# Altium PCB PCB2.PcbDoc
Units mm, origin at the board's own origin, x right, y up, seen from the top; angles counter-clockwise.
Board outline 80 x 70 mm, 4 copper layers (Top Layer, Internal Plane 1, Internal Plane 2, Bottom Layer), stack 0.462 mm thick; 51 components, 38 nets, 151 pads, 32 vias.
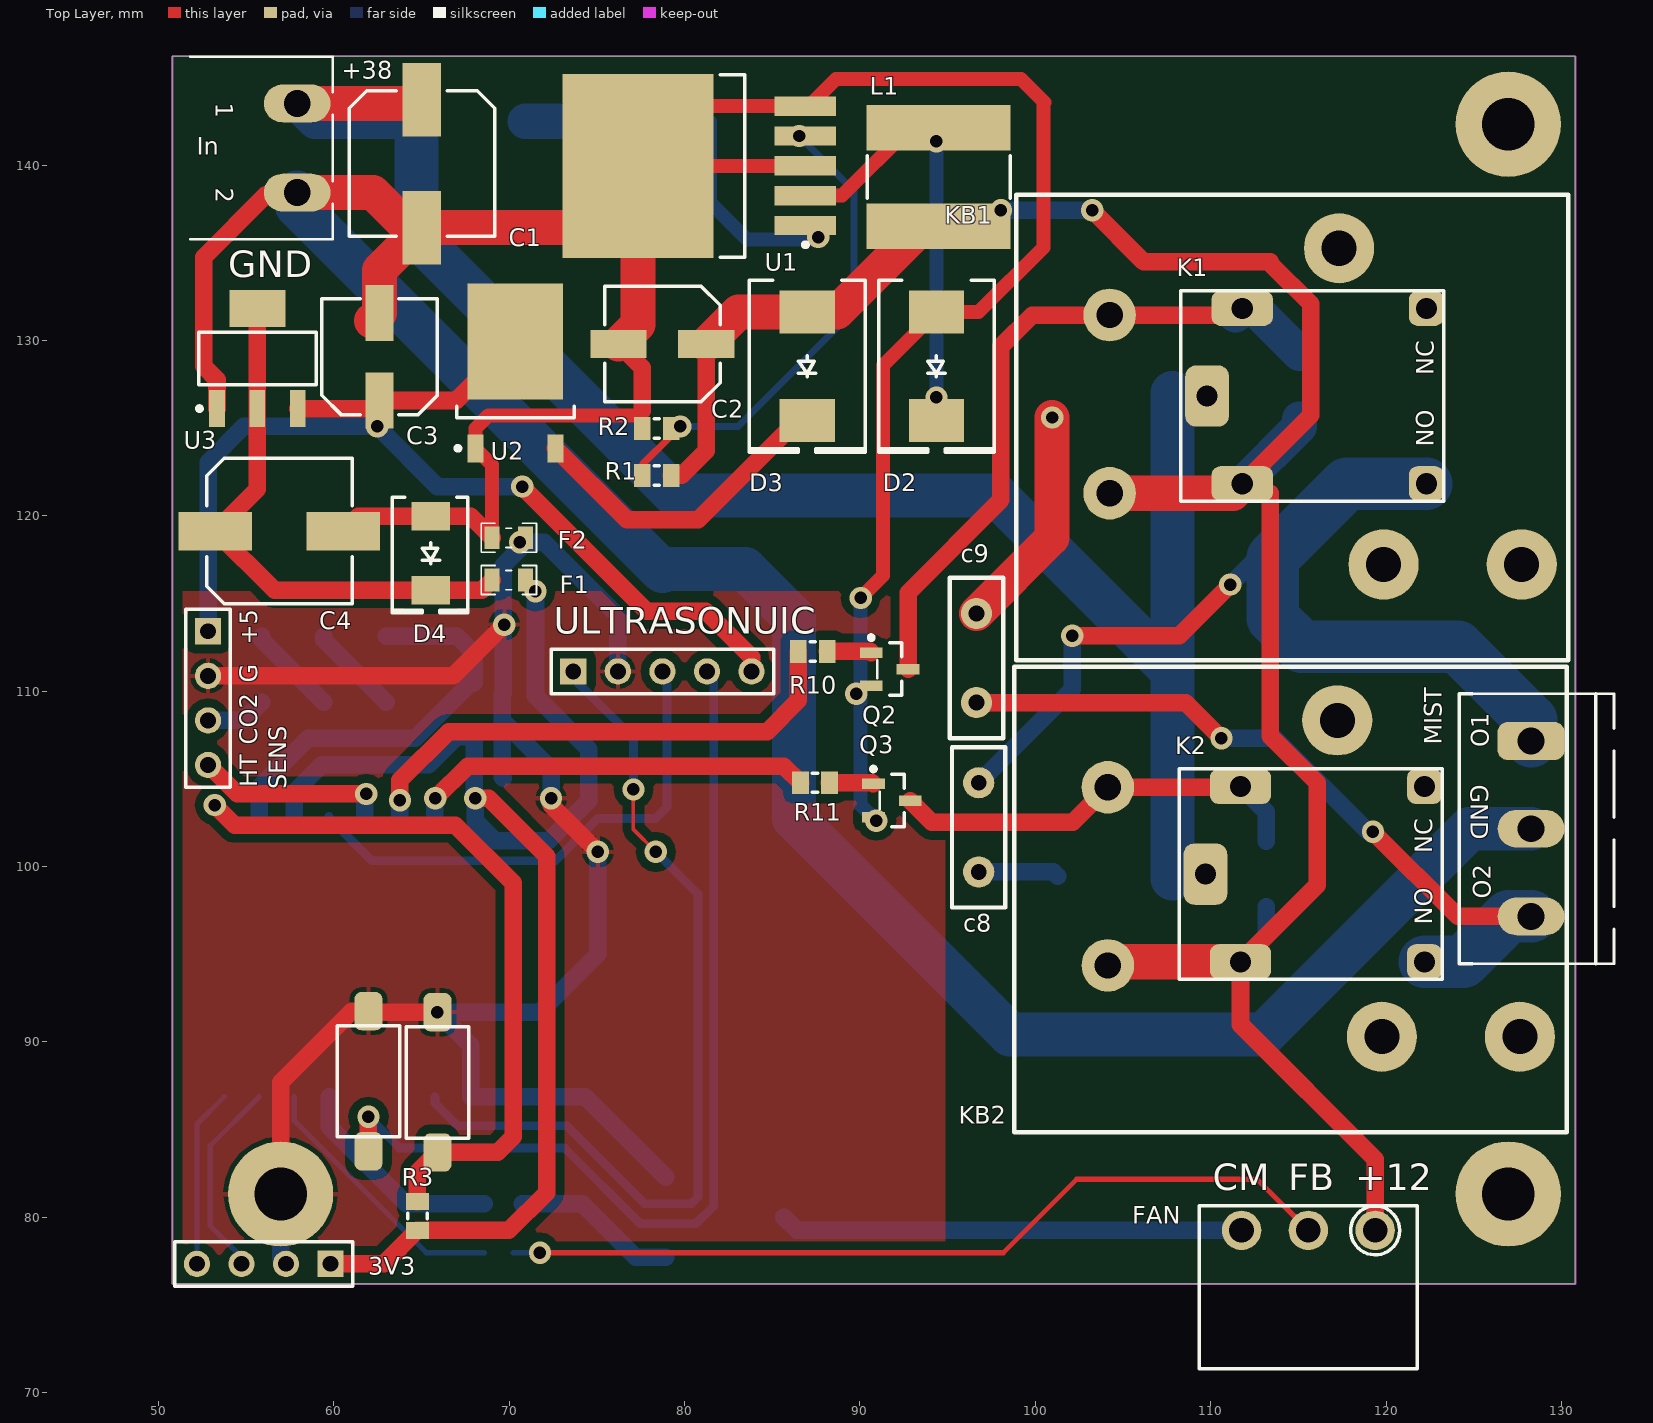
[diagram p0: Top Layer view]
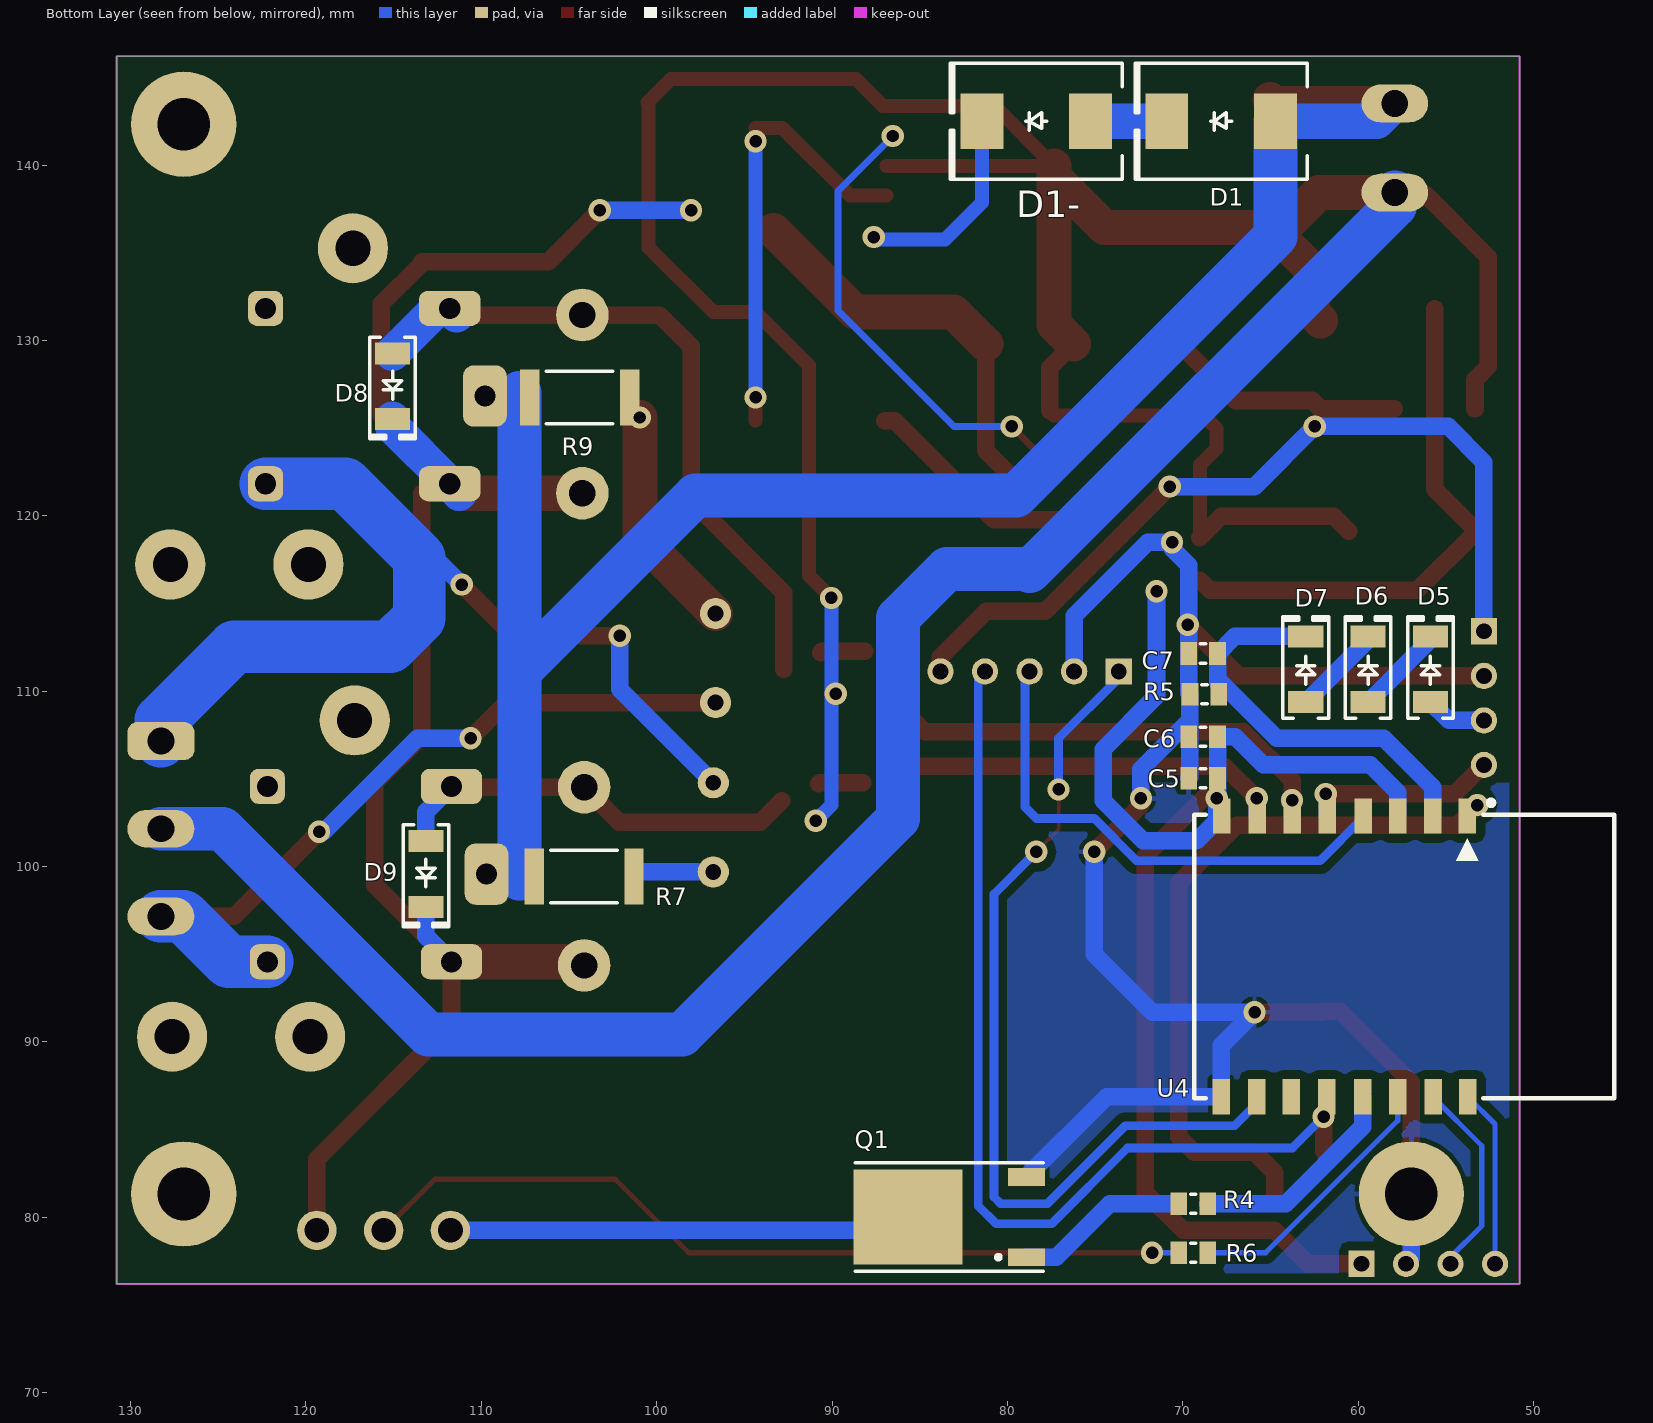
[diagram p1: Bottom Layer view, seen from below]
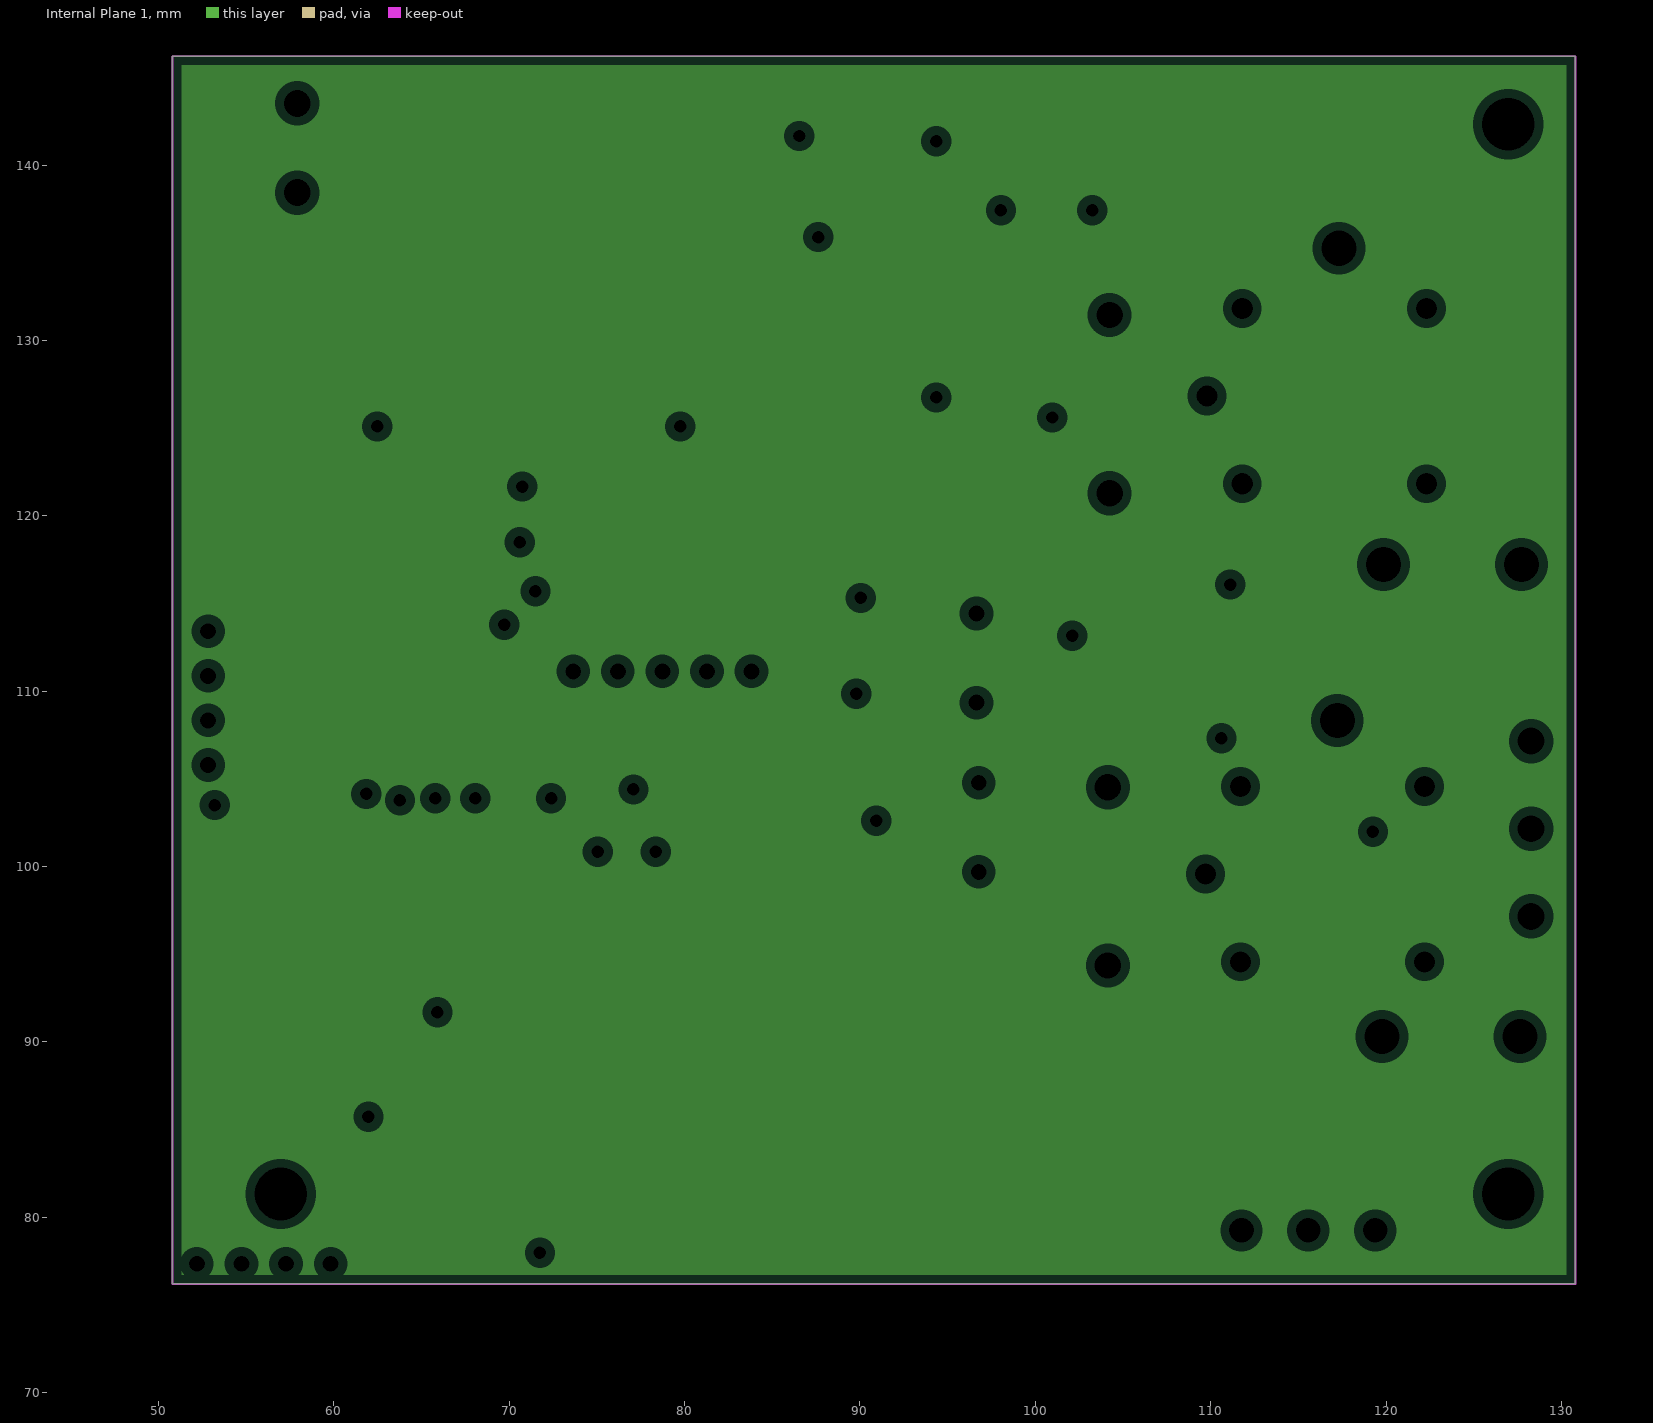
[diagram p2: Internal Plane 1, clearances drawn from the general rule]
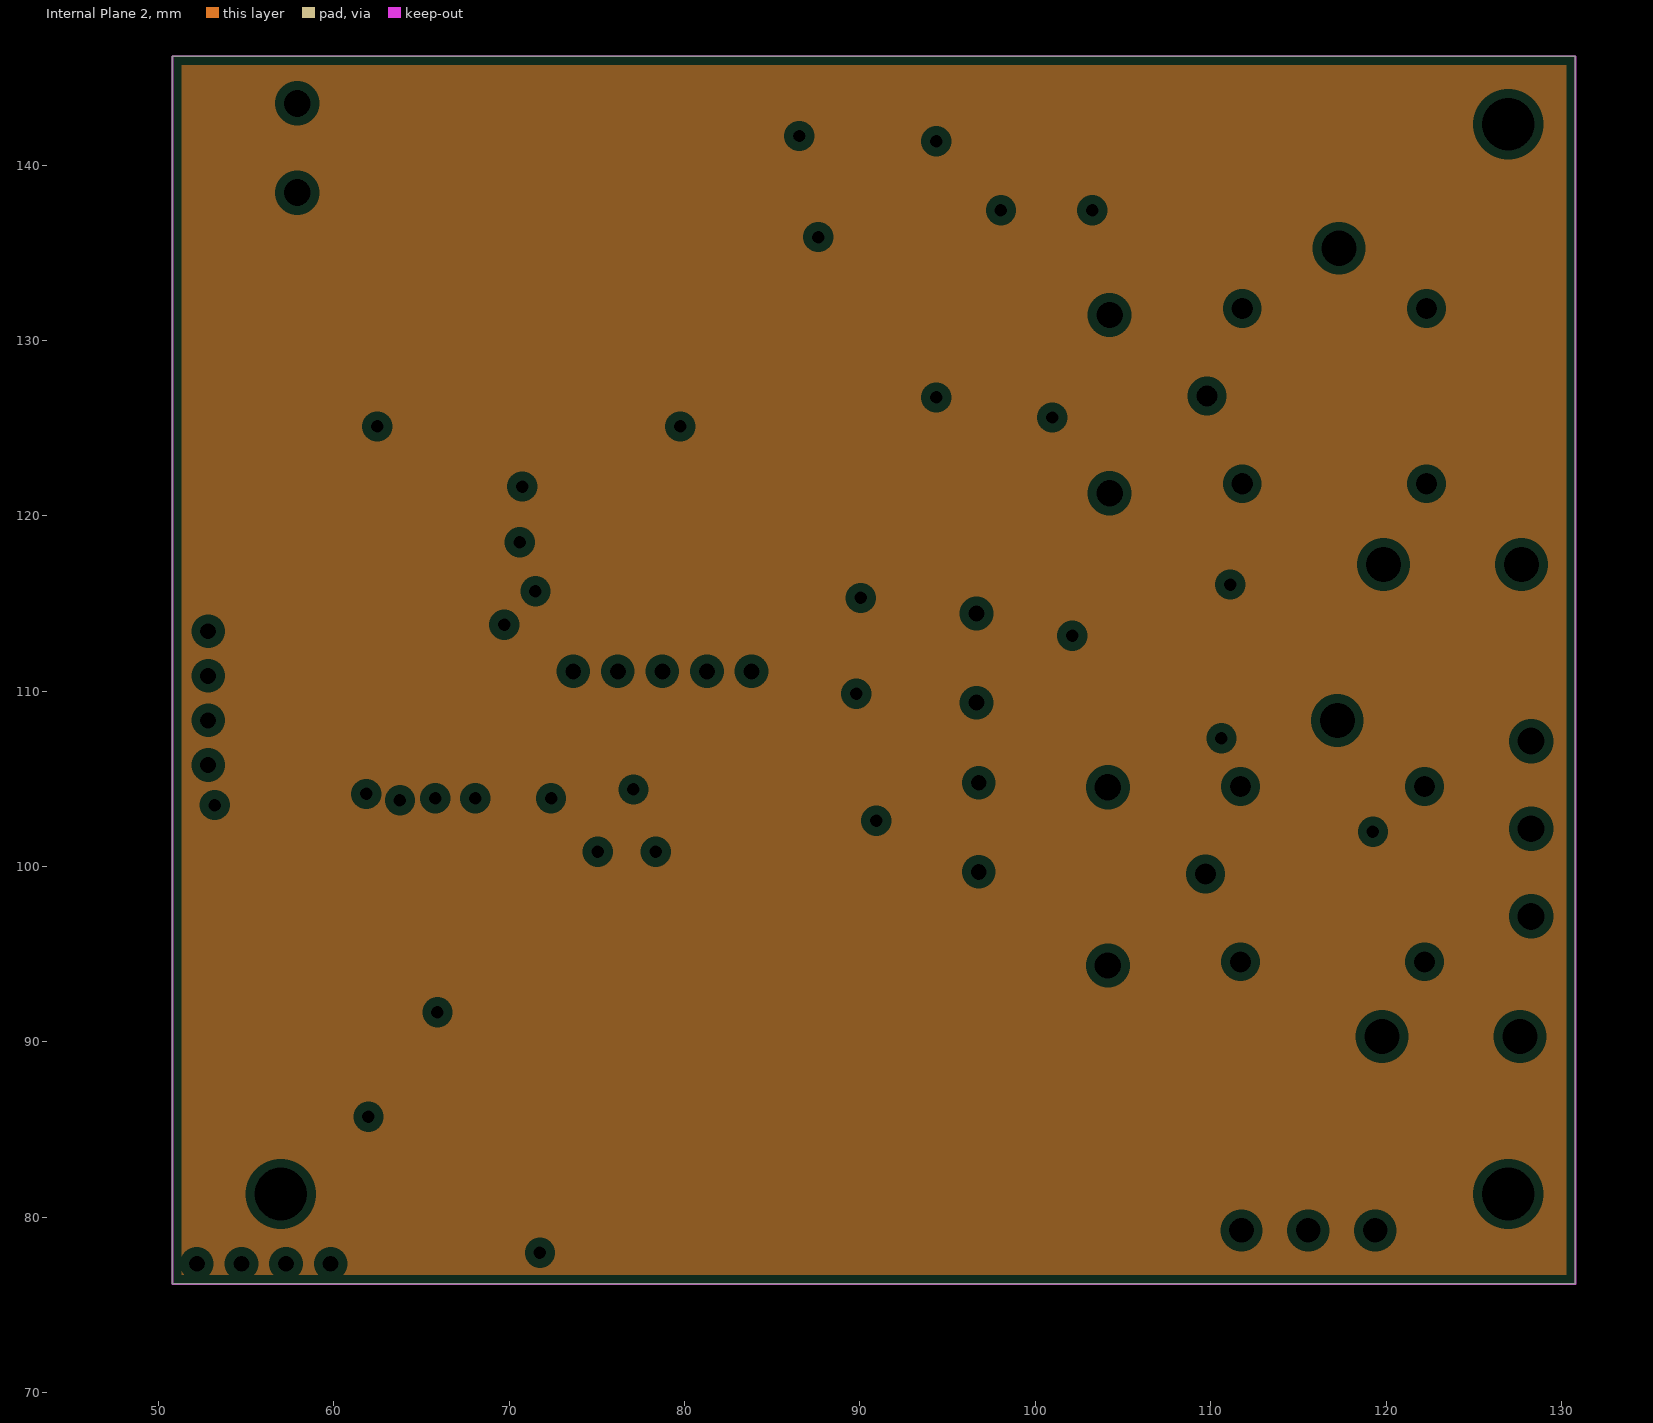
[diagram p3: Internal Plane 2, clearances drawn from the general rule]
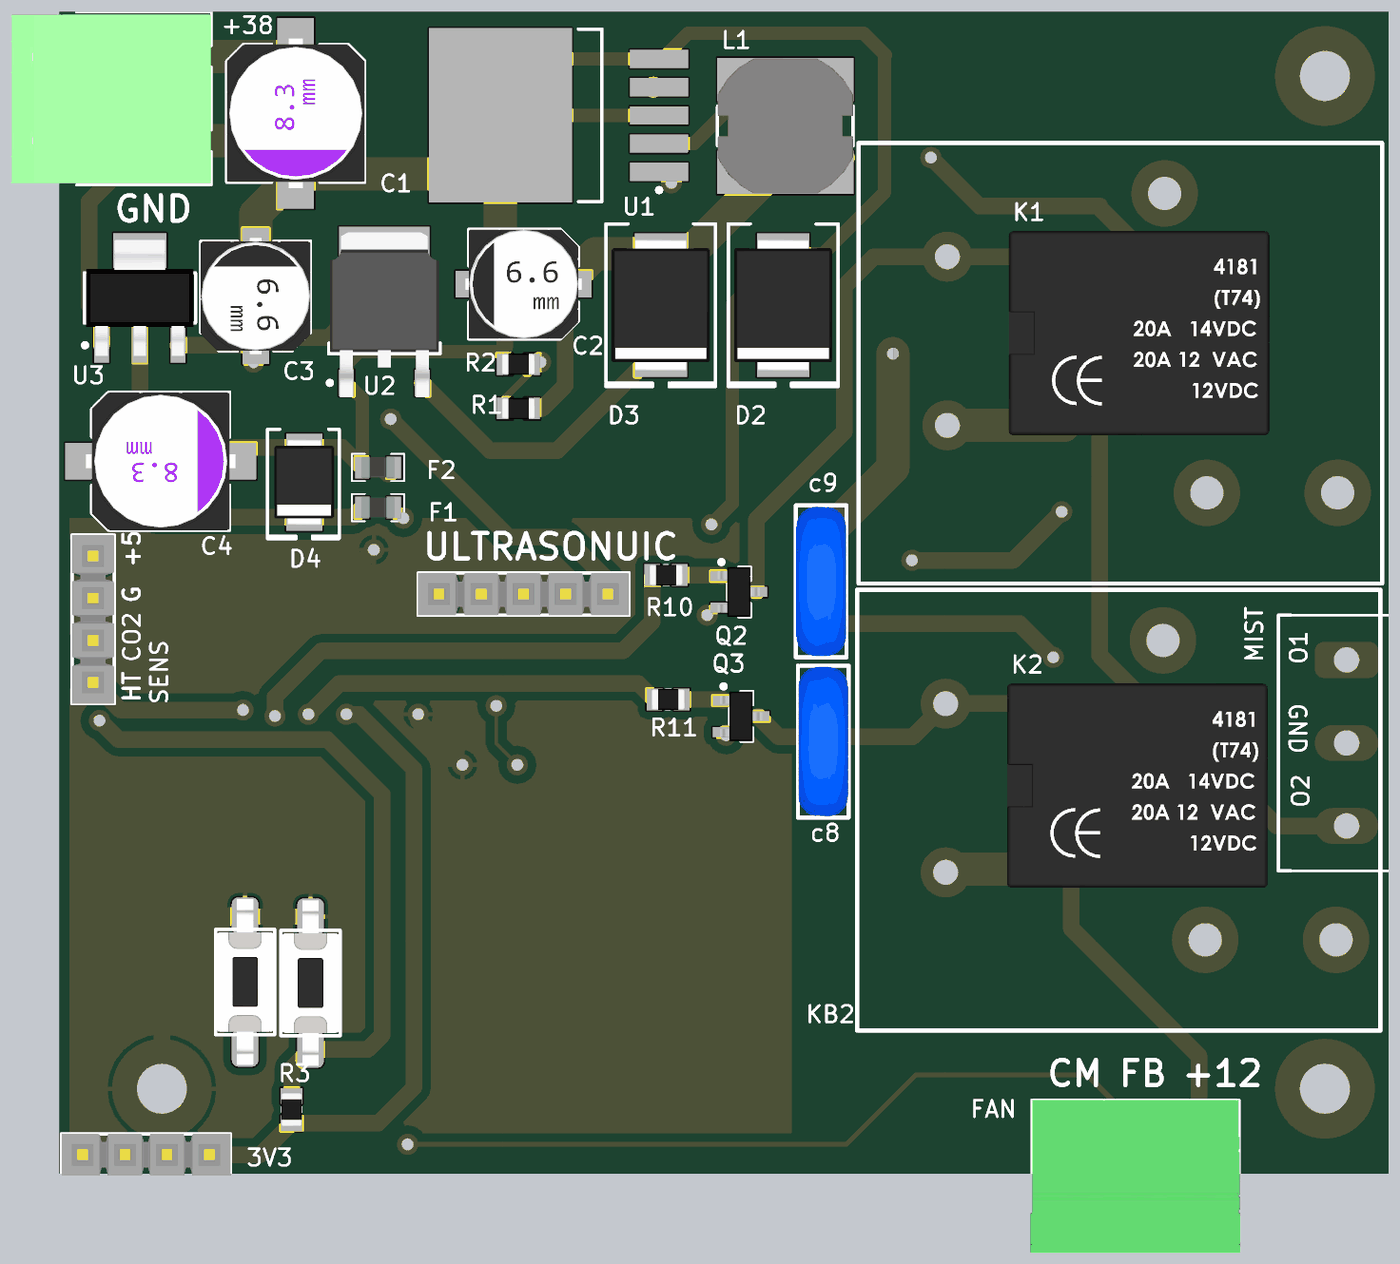
[diagram p4: 3D render of the assembled board from above, using the file's embedded part models]
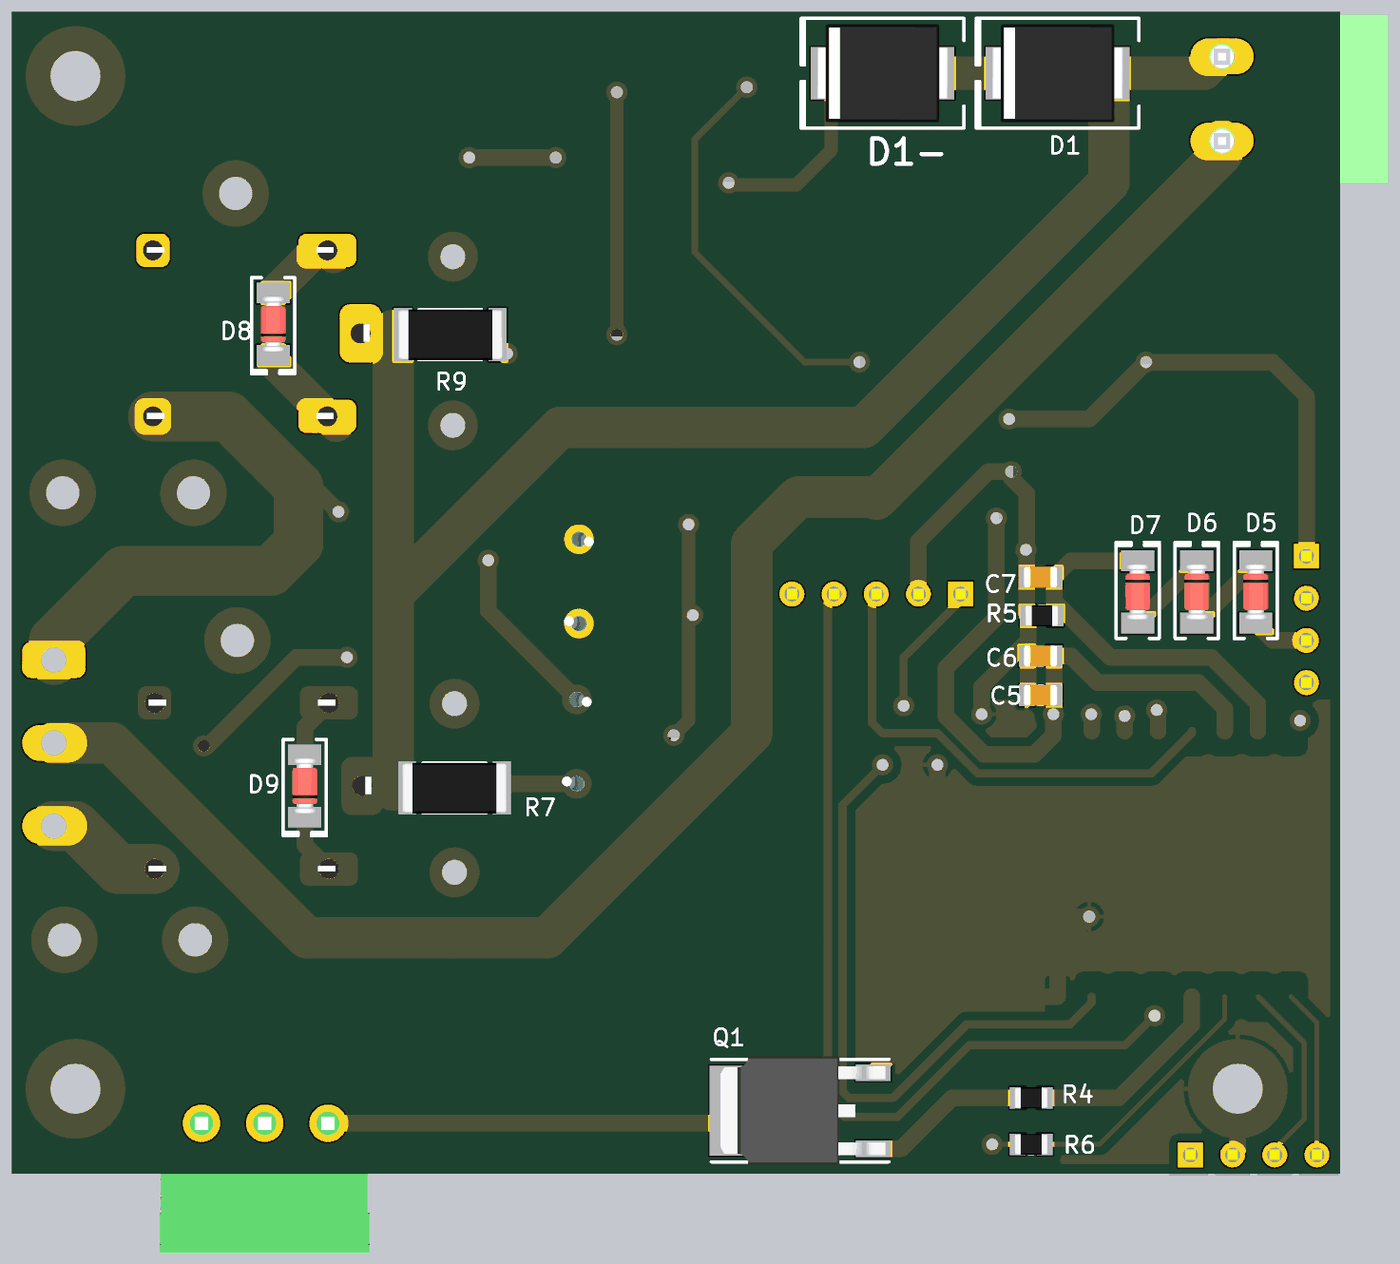
[diagram p5: 3D render of the assembled board from below, using the file's embedded part models]

## Layer stack, top to bottom
Top Solder: solder mask 0.0102, Solder Resist, Dk 3.5
Top Layer: signal copper 0.0356
Internal Plane 1: plane copper 0.0356
Internal Plane 2: plane copper 0.0356
Dielectric 1: dielectric 0.32, FR-4, Dk 4.8
Bottom Layer: signal copper 0.0356
Bottom Solder: solder mask 0.0102, Solder Resist, Dk 3.5

## Board outline
50.8,76.2 130.8,76.2 130.8,146.2 50.8,146.2

## Design rules (kind name [scope] priority, off if disabled: settings)
Clearance [All] p1: gap=0.2 ignorepadtopadclearanceinfootprint=FALSE except(0.5: Arc-Poly Track-Poly SMDPad-Poly THPad-Poly Via-Poly Fill-Poly Poly-Poly)
PlaneClearance [All] p1: clearance=0.508
PlaneConnect [All] p1: planeconnectstyle=Relief reliefexpansion=0.508 reliefentries=4 reliefconductorwidth=0.254 reliefairgap=0.254
PolygonConnect [All] p1: connectstyle=Relief reliefconductorwidth=0.254 reliefentries=4 polygonreliefangle="90 Angle" airgapwidth=0.254
RoutingVias [All] p1: holewidth=0.6 width=1 viastyle="Through Hole" minholewidth=0.6 minwidth=0.8 maxholewidth=0.711 maxwidth=1.27
SolderMaskExpansion [All] p1: expansion=0.102
Width [All] p1: maxlimit=3 minlimit=0.2 preferedwidth=2 minimp=50.000000 maximp=50.000000 favimp=50.000000
28 further rules are at their usual default settings.

## Classes and differential pairs
component class timer: C1 C2 C3 C4 C5 C6 C7 c8 c9 D1 D1- D2 D3 D4 D5 D6 D7 D8 D9 F1 F2 FAN In K1 K2 KB1 KB2 L1 MIST Q1 Q2 Q3 R1 R2 R3 R4 R5 R6 R7 R9 R10 R11 SENS U1 U2 U3 U4 ULTRASONUIC

## Components (designator, comment, footprint, x,y, rotation, side; value= is the part's Value field where it differs from the comment)
3V3 "Header 4" HDR1X4 59.817,77.343 r180 top (schematic designator PR)
C1 "Cap Polar" "CAP ALSMD POLY 8.3MM H10.5MM" 65.024,140.081 r270 top
C2 "220uF" "CAP ALSMD 6.6MM H8.0MM" 78.74,129.794 r180 top
C3 "220uF" "CAP ALSMD 6.6MM H8.0MM" 62.611,129.072 r90 top
C4 "1000uF" "CAP ALSMD POLY 8.3MM H10.5MM" 56.896,119.126 r0 top
C5 "100nF" SMD_CAP_0805 69.669,105.029 r180 bottom
C6 "10uF" SMD_CAP_0805 69.669,107.4 r180 bottom
C7 "10uF" SMD_CAP_0805 69.669,112.141 r180 bottom
c8 "100nF" CAP-20 96.774,102.235 r90 top
c9 "100nF" CAP-20 96.647,111.887 r270 top
D1 "M7" "DO214AB SMC" 67.818,142.494 r0 bottom
D1- "M7" "DO214AB SMC" 78.359,142.494 r0 bottom
D2 "SS34" "DO214AB SMC" 94.361,128.524 r270 top
D3 "M7" "DO214AB SMC" 86.995,128.524 r270 top
D4 "TVS3.3" "ST DO214AA SMB" 65.532,117.856 r270 top
D5 "1n4148" "SOD-80 MiniMELF" 55.88,111.252 r90 bottom
D6 "1n4148" "SOD-80 MiniMELF" 59.436,111.252 r90 bottom
D7 "1n4148" "SOD-80 MiniMELF" 62.992,111.252 r90 bottom
D8 "1n4148" "SOD-80 MiniMELF" 115.062,127.381 r270 bottom
D9 "1n4148" "SOD-80 MiniMELF" 113.157,99.568 r270 bottom
F1 "Ferrite Bead SMD" FB0805 69.977,116.332 r180 top
F2 "Ferrite Bead SMD" FB0805 69.977,118.745 r180 top
FAN "FCI-381-3P" "FCI 06-381-3PIN" 115.57,75.946 r180 top
FLASH "Switch PB" "TE FSMSMTR" 61.976,87.757 r180 top
In "" "MSTB 2,5/2-G-5,08" 57.912,140.97 r270 top
K1 "Relay" "Relay mini milon" 116.051,126.826 r90 top
K2 "Relay" "Relay mini milon" 115.951,99.568 r90 top
KB1 "Relay" Relay-NT90 117.321,135.255 r270 top
KB2 "Relay" Relay-NT90 117.221,108.331 r270 top
L1 "33uH" "BOURNS SRN8040" 94.488,139.319 r270 top
MIST "FCI-381-3P" "MSTBV 2,5/3-G-5" 128.27,102.155 r90 top
Q1 "MJE13003" TO-252 82.296,80.01 r270 bottom
Q2 "BC817" SOT23_N 91.694,111.252 r0 top
Q3 "BC817" SOT23_N 91.821,103.759 r0 top
R1 "?" "RES 0805 (2012X06L)" 77.597,122.301 r0 top
R2 "1.21K" "RES 0805 (2012X06L)" 77.597,124.968 r0 top value=1.21k
R3 "1.21K" "RES 0805 (2012X06L)" 64.77,80.899 r270 top value=1.21k
R4 "1k" "RES 0805 (2012X06L)" 68.58,80.772 r0 bottom
R5 "1k" "RES 0805 (2012X06L)" 67.946,109.819 r0 bottom
R6 "1k" "RES 0805 (2012X06L)" 70.23,77.978 r180 bottom
R7 "22" "RES 2512 (6331X07L)" 104.14,99.441 r180 bottom
R9 "22" "RES 2512 (6331X07L)" 104.394,126.746 r180 bottom
R10 "1K" "RES 0805 (2012X06L)" 88.138,112.268 r180 top
R11 "1K" "RES 0805 (2012X06L)" 88.264,104.775 r180 top
RST "Switch PB" "TE FSMSMTR" 65.913,87.694 r0 top
SENS "Header 4" HDR1X4 52.832,113.411 r270 top
U1 "LM2596S-ADJ" TS5B_M 80.843,139.954 r180 top
U2 "AMS1117IMP-x.x_1" TO-252-AMS1117 70.358,128.143 r90 top
U3 "AMS1117IMP-x.x_1" SOT223-AMS1117 55.64,128.961 r90 top
U4 "ESP-8266" ESP_12E 45.452,102.921 r270 bottom
ULTRASONUIC "Header 5" HDR1X5 73.66,111.125 r0 top

## Footprints (in the part's own frame and the unit in brackets; to place one, negate y for a bottom-side part, rotate by r counter-clockwise, add the part's x,y. Pads: shape width x height; smd on the part's side, far side on the other; paste and mask are expansions set on the pad)
"BOURNS SRN8040" [mm] "Power Inductor, 2-Leads, Bourns, SRN8040-220M"
  rect 2.6x8.2 smd: 1(-2.8,0) 2(2.8,0)
  silkscreen extent -1.2,-4.07 1.2,4.08, body extent -4.08,-4.07 4.07,4.08, height 4
"CAP ALSMD 6.6MM H8.0MM" [mm] "Aluminum Electrolytic Capacitor, Body 6.60x6.60x8.0mm, IPC Low Density"
  rect 3.2x1.6 smd: 1(-2.5,0) 2(2.5,0)
  silkscreen extent -3.3,-3.3 3.3,3.3, body extent -3.5,-3.3 3.5,3.3, height 8
"CAP ALSMD POLY 8.3MM H10.5MM" [mm] "Aluminum Electrolytic Capacitor, Body 8.30x8.30x10.5mm"
  rect 4.2x2.2 smd: 1(-3.65,0) 2(3.65,0)
  silkscreen extent -4.15,-4.15 4.15,4.15, body extent -4.5,-4.15 4.5,4.15, height 10.5
CAP-20 [mil]
  round 70 hole 35.43 mask+0: 1(-100,0) 2(100,0)
  silkscreen extent -180,-60 180,60, body extent -177,-59 177,59, height 491
"DO214AB SMC" [mm] "Molded Diode, 2-Leads, Body 6.85x5.90mm, IPC Medium Density"
  rect 2.45x3.15 smd: 1(-3.1,0) 2(3.1,0)
  silkscreen extent -4.9,-3.3 4.9,3.3, body extent -3.97,-2.95 3.97,2.95, height 2.6
ESP_12E [mm]
  rect 2x1 smd: 1(0.051,-8.331) 2(0.051,-10.301) 3(0.051,-12.301) 4(0.051,-14.271) 5(0.051,-16.311) 6(0.051,-18.321) 7(0.051,-20.311) 8(0.051,-22.321) 9(16.051,-22.361) 10(16.051,-20.321) 11(16.051,-18.361) 12(16.051,-16.341) 13(16.051,-14.281) 14(16.051,-12.301) 15(16.051,-10.281) 16(16.051,-8.301)
  silkscreen extent -0.86,-23.9 16.13,0.04, body extent 0.05,-23.88 16.05,0.5, height 2.6
FB0805 [mm] "Ferrite Chip Bead SMD 0805-Design:Ali Hafizi"
  rect 0.85x1.3 smd: 1(-0.95,0) 2(0.95,0)
  silkscreen extent -1.57,-0.82 1.58,0.83, body extent -1,-0.63 1,0.62, height 0.85
"FCI 06-381-3PIN" [mm] "FCI Pluggable Terminal Block"
  round 2.25 hole 1.4: 1(-3.81,-3.302) 2(0,-3.302) 3(3.81,-3.302)
  silkscreen extent -6.22,-4.7 6.22,4.57, body extent -6.31,-4.7 6.31,4.5, height 7.6
HDR1X4 [mm] "Connector; Header; 4 Position"
  rect 1.5x1.5 hole 0.9: 1(0,0)
  round 1.5 hole 0.9: 2(2.54,0) 3(5.08,0) 4(7.62,0)
  silkscreen extent -1.27,-1.27 8.89,1.27, body extent -1.27,-1.28 8.89,1.26, height 8.38
HDR1X5 [mm] "Connector; Header; 5 Position"
  rect 1.5x1.5 hole 0.9: 1(0,0)
  round 1.5 hole 0.9: 2(2.54,0) 3(5.08,0) 4(7.62,0) 5(10.16,0)
  silkscreen extent -1.27,-1.27 11.43,1.27, body extent -1.28,-1.27 11.42,1.27, height 8.38
"MSTB 2,5/2-G-5,08" [mil] "Header, Nominal current: 12 A Rated voltage (III/2): 320 V Number of positions: 2 Pitch: 5.08 mm Color: green Contact surface: Tin Assembly: Soldering DESIGNER:ABBAS BASEREH"
  oval 85x150 hole 60: 1(-100,0) 2(100,0)
  silkscreen extent -205,-240 205,80, body extent -199,-394 201,79, height 340
"MSTBV 2,5/3-G-5" [mil] "Header, Nominal current: 12 A Rated voltage (III/2): 320 V Number of positions: 3 Pitch: 5mm Color: green Contact surface: Tin Assembly: Soldering  DESIGNER:ABBAS BASEREH"
  rrect50% 85x150 hole 60: 1(196.85,0)
  oval 85x150 hole 60: 2(0,0) 3(-196.85,0)
  silkscreen extent -303,-186 303,161, body extent -295,-185 295,154, height 473
"Relay mini milon" [mm]
  rrect50% 3.5x2.5 hole 1.2: 1(0,6.25)
  rrect50% 2x2 hole 1.2: 2(5,-6.25) 3(-5,-6.25)
  rrect50% 2x3.5 hole 1.2: 4(5,4.25) 5(-5,4.25)
  silkscreen extent -6,-7.25 6,7.75, body extent -6.13,-7.58 6.17,8.12, height 13.71
Relay-NT90 [mm]
  round 4 hole 2: 1(0,0) 2(18.034,10.414) 3(18.034,2.54)
  round 3 hole 1.5: 4(3.81,-13.081) 5(13.97,-13.081)
  silkscreen extent -3.05,-18.41 23.5,13.08
"RES 0805 (2012X06L)" [mm] "Chip Resistor, 2-Leads, Body 2.0x1.3mm, IPC High Density _ (0.100 W)"
  rect 0.95x1.3 smd: 1(0,0) 2(1.65,0)
  silkscreen extent 0.67,-0.55 0.97,0.55, body extent -0.19,-0.63 1.84,0.64, height 0.6
"RES 2512 (6331X07L)" [mm] "Chip Resistor, 2-Leads, Body 6.3x3.1mm, IPC High Density _ (0.500 W)"
  rect 1.1x3.2 smd: 1(-2.85,0) 2(2.85,0)
  silkscreen extent -1.9,-1.5 1.9,1.5, body extent -3.18,-1.52 3.17,1.52, height 0.6
SMD_CAP_0805 [mm]
  rect 0.95x1.3 smd: 1(0,0) 2(1.65,0)
  silkscreen extent 0.67,-0.55 0.97,0.55, body extent -0.19,-0.64 1.84,0.63, height 0.65
"SOD-80 MiniMELF" [mm] "Molded Diode, 2-Leads, Body 3.40x1.50mm, IPC Medium Density"
  rect 1.25x2 smd: 1(-1.875,0) 2(1.875,0)
  silkscreen extent -2.8,-1.3 2.99,1.3, body extent -1.7,-0.75 1.7,0.75, height 1.5
SOT23_N [mm] "SOT23, 3-Leads, Body 2.9x1.3mm, Pitch 0.95mm, Lead Span 2.3mm, IPC Medium Density"
  rect 1.3x0.6 smd: 1(-1.05,0.95) 2(-1.05,-0.95) 3(1.05,0)
  silkscreen extent -1.17,-1.5 0.7,1.92, body extent -1.27,-1.5 1.27,1.5, height 1.1
SOT223-AMS1117 [mm] "SOT223, 4-Leads, Body 6.5x3.5mm, Pitch 2.3mm, Lead Span 7mm, IPC High Density"
  rect 2.1x0.9 smd: 1(-2.85,2.3) 2(-2.85,0) 3(-2.85,-2.3)
  rect 2.1x3.2 smd: 4(2.85,0)
  silkscreen extent -2.97,-3.35 1.5,3.42, body extent -3.49,-3.24 3.49,3.24, height 1.64
"ST DO214AA SMB" [mm] "Molded Diode, 2-Leads, Body 4.31x3.62mm, IPC Medium Density"
  rect 1.62x2.18 smd: 1(-2.11,0) 2(2.11,0)
  silkscreen extent -3.2,-2.2 3.4,2.1, body extent -2.6,-1.8 2.6,1.8, height 2.4
"TE FSMSMTR" [mm]
  rrect50% 1.6x2.19 smd: 1(0,4) 2(0,-4)
  silkscreen extent -1.78,-3.18 1.78,3.18, body extent -1.75,-4.98 1.75,4.98, height 4.42
TO-252 [mm] "D-PAK/TO-252-AA; 3 Leads (1 Cropped); Body 10.1 (inc. leads) x 6.6 mm (LxW max)"
  rect 1x2.1 smd: 1(2.285,3.375) 3(-2.285,3.375)
  rect 5.4x6.2 smd: 2(0,-3.375)
  silkscreen extent -3.09,-6.38 3.08,4.32, body extent -3.27,-5.83 3.27,4.11, height 2.39
TO-252-AMS1117 [mm] "D-PAK, 4-Leads, Body 6.1x6.6mm, Pitch 2.29mm, Lead Span 9.7mm, IPC High Density"
  rect 1.6x0.9 smd: 1(-4.3,2.28) 3(-4.3,-2.28)
  round 1.524 smd: 2(-0.127,-0.127)
  rect 6.6x5.45 smd: 4(1.8,0)
  silkscreen extent -4.42,-3.35 -1.9,3.4, body extent -5.18,-3.27 4.76,3.27, height 2.34
TS5B_M [mm] "D2-PAK, 6-Leads, Body 8.6x10.2mm, Pitch 1.7mm, Lead Span 14.1mm, IPC Low Density"
  rect 3.5x1.1 smd: 1(-6.05,3.4) 2(-6.05,1.7) 3(-6.05,0) 4(-6.05,-1.7) 5(-6.05,-3.4)
  rect 8.6x10.5 smd: 6(3.5,0)
  silkscreen extent -6.18,-5.2 -1.2,5.2, body extent -2.6,-5.2 6.29,5.2, height 4.65

## Part data
3V3 SENS: "Header, 4-Pin", LatestRevisionDate=17-Jul-2002, LatestRevisionNote="Re-released for DXP Platform.", Publisher="Altium Limited"
C2 C3 C4: library part "Cap Polar", "Cap Polar"
C5 C6 C7 c8 c9: library part Cap-Bipolar, "Bipolar Capacitor", Voltage=100V, Adding Date=1387/12/20, Designer="Saeid Jorablo", Organazation=ControTec
D1 D1- D2 D3 D5 D6 D7 D8 D9: library part Diode, "Rectifier Diode"
D4: library part "Diode TVS", "Zener Diode"
F1 F2: library part "Ferrite Bead SMD Package", Designer="Ali Hafizi"
FAN MIST: "6 Pitch: 5.08 mm Color: green Contact surface: Tin Assembly", Manufacturer="PHOENIX CONTACT", Max Current="12 A", Voltage="320 V", Category=Connector, ComponentLink1Description="Header, Nominal current: 12 A Rated voltage (III/2): 320 V Number of positions: 6 Pitch: 5.08 mm Color: green Contact surface: Tin Assembly: Soldering  DESIGNER:ABBAS BASEREH", ComponentLink2Description=Reference, Connector type="PCB Terminal Block", Designer="ABBAS BASEREH", Mounting Technology=Through-Hole, PART.NO=PHOENIX, Pin Count=6, Positions=6, Revision 1=2017-3-1, Status=Unreleased
FLASH RST: "Push Button Switch"
In: library part CON_Phoenix_MSTB_02, "2 Pitch: 5.08 mm Color: green Contact surface: Tin Assembly", Manufacturer="PHOENIX CONTACT", Max Current="12 A", Voltage="320 V", Category=Connector, ComponentLink1Description="Header, Nominal current: 12 A Rated voltage (III/2): 320 V Number of positions: 2 Pitch: 5.08 mm Color: green Contact surface: Tin Assembly: Soldering  DESIGNER:ABBAS BASEREH", ComponentLink2Description=Reference, Connector type="PCB Terminal Block", Designer="ABBAS BASEREH", Mounting Technology=Through-Hole, PART.NO=PHOENIX, Pin Count=2, Positions=2, Revision 1=2017-3-1, Status=Unreleased
K1 K2 KB1 KB2: "SPDT Relay", Company=E.P.I.L, Design_Date=2011/10/31, Designer="Eng. Saeid Jorablo"
L1: library part "Inductor smd", "SMD Power Inductor WE-LHMI, L=6.8 µH", Inductance="6.8 µH", PartNumber=74437324068, ComponentLink1Description="Manufacturer URL", ComponentLink1URL=http://www.we-online.com, ComponentLink2Description=Datasheet, ComponentLink2URL=http://katalog.we-online.de/kataloge/eisos/media/pdf/74437324068.pdf, PackageReference="WE-LHMI 4020"
Q1: library part NPN, "NPN Transistor", Company="IPA CO", Designer="Saeid Jorablo", Last Update Time=2008/08/04
Q2 Q3: "45 V, 500 mA NPN general-purpose transistors", ComponentLink1Description="Manufacturer Link", ComponentLink1URL=http://www.nxp.com/, ComponentLink2Description=Datasheet, ComponentLink2URL=http://www.nxp.com/, DatasheetVersion=2017, LatestRevisionDate=2017, LatestRevisionNote="IPC-7351 Footprint Added.", PackageDescription="3-Pin SOT-23 Package 0.95 mm Pitch, 2.3 mm Lead Span", PackageReference=SOT23, PackageVersion=2017-2-8, Published=2017-2-8, Publisher="Abbas Basereh"
R1 R2 R3 R4 R5 R6 R7 R9: library part Resistor, "Resistor"
R10 R11: library part Resistor, "Resistor", Power=1/4w
U1: "SIMPLE SWITCHER® Power Converter 150 KHz 3A Step-Down Voltage Regulator, 5-pin TO-263", Manufacturer="National Semiconductor", PackageTopMarking="NSUZXYTTE#*LM2596S*-ADJ P+", PowerWise=N, Code_JEDEC=MO-169-AB, ComponentLink1Description="Manufacturer URL", ComponentLink1URL=http://www.national.com/, ComponentLink2Description="LM2596 Datasheet", ComponentLink2URL=http://www.national.com/ds/LM/LM2596.pdf, ComponentLink3Description="LM2596 Web Page", ComponentLink3URL=http://www.national.com/pf/LM/LM2596.html, ComponentLink4Description="TS5B Package Page", ComponentLink4URL=http://www.national.com/packaging/folders/ts5b.html, CompType=Switcher, DatasheetVersion=May-2002, High-Reliability=Y, PackageDescription="TO-263, Molded, .400 x .390 x .180in, 5 Lead, .067in Pitch, Surface Mount", PackageReference=TS5B, PackageVersion="revD, Apr-2005", PartNumber=LM2596S-ADJ, PinCount=5, RoHS=N
U2 U3: "x.x Volt, 800mA Low-Dropout Linear Regulator, 4-pin SOT-223", Manufacturer="National Semiconductor", PackageTopMarking=XYTT*N05B, PartNumber=LM1117IMP-3.3, PowerWise=N, Supplier Part Number 1=7614123, Code_IPC=SOT223-4, Code_JEDEC=TO-261-AA, ComponentLink1Description="LM1117 Datasheet", ComponentLink1URL=http://www.national.com/ds/LM/LM1117.pdf, ComponentLink2Description="LM1117 Web Page", ComponentLink2URL=http://www.national.com/pf/LM/LM1117.html, ComponentLink3Description="MP04A Package Page", ComponentLink3URL=http://www.national.com/packaging/folders/mp04a.html, CompType="LDO IC", DatasheetVersion=Apr-2006, PackageDescription="Molded SOT-223, 6.50 x 3.56 x 1.6mm Body, 4 Lead, 2.3mm Pitch", PackageReference=MP04A, PackageVersion="revB, Apr-2003", PinCount=4, Published=4-Dec-2008, Publisher="Altium Limited", RoHS=N, Supplier 1=Farnell
ULTRASONUIC: "Header, 5-Pin", LatestRevisionDate=17-Jul-2002, LatestRevisionNote="Re-released for DXP Platform.", Publisher="Altium Limited"

## Free pads (board coordinates)
  round 6 hole 3: 19(56.968,81.328) 19(126.968,81.328) 19(126.968,142.328)

## Via types
v1: diameter 1.27, hole 0.711, Top Layer to Bottom Layer, tented both sides, 32 vias

## Nets (pads, with @x,y where several pads share a name; then routed paths per layer and width w, separated by ;. In a path a pad name is that pad's centre, name@x,y a point inside that pad or via, vN(x,y) a via of type N, cw(c..) or ccw(c..) an arc to the next point about the centre after c; other vN are vias at no path point)
+5: C3.1 SENS.1 U2.2 U2.4 U3.3 ULTRASONUIC.5 | length 61.8
  Top Layer w1: U3.3 62.15,126.111 C3.1 66.987,126.572 U2.4 ; v1(70.739,121.666) 77.851,114.554 81.206,114.554 83.82,111.94 ULTRASONUIC.5
  Bottom Layer w1: SENS.1 52.832,123.063 54.864,125.095 v1(62.484,125.095) 65.913,121.666 v1(70.739,121.666)
+12: C2.1 D3.1 D8.2 D9.2 FAN.1 K1.5 K2.5 KB1.5 KB2.5 L1.2 R1.2 | length 137.5
  Top Layer w1: R1.2 79.843,122.301 81.24,123.698 C2.1 ; v1(103.251,137.414) 106.172,134.493 113.411,134.493 113.411,134.366 115.697,132.08 115.697,125.722 K1.5 ; KB1.5 113.411,121.285 113.411,107.442 116.078,104.775 116.078,98.945 K2.5 111.701,90.991 119.38,83.312 FAN.1
  Top Layer w2: C2.1 83.07,131.624 D3.1 88.704,131.624 L1.2@93.348,136.268 ; KB2.5 104.347,94.568 K2.5 ; KB1.5 111.26,121.285 K1.5
  Bottom Layer w1: v1(98.044,137.414) v1(103.251,137.414) ; K2.5 113.157,96.024 D9.2
  Bottom Layer w2: K1.5@111.26,121.285 K1.5 115.062,125.087 D8.2
+38: C1.1 D1.1 In.1 K1.1 K2.1 R7.1 R9.1 | length 102.1
  Top Layer w2: In.1 64.803,143.51 C1.1
  Bottom Layer w2: In.1 58.928,142.494 D1.1
  Bottom Layer w2.5: D1.1 64.718,135.942 79.502,121.158 97.79,121.158 107.823,111.125 ; 107.823,99.314 107.823,111.125 ; 107.823,127 107.823,111.125
AD: C7.2 D7.2 R5.1 U4.2 | length 23.5
  Bottom Layer w1: U4.2 55.753,104.521 58.547,107.315 64.643,107.315 67.818,110.49 68.019,110.49 C7.2 67.033,113.127 D7.2
AGND: C1.2 C2.2 C3.2 C4.2 D2.1 D4.1 F2.2 In.2 MIST.2 Q2.2 Q3.2 R2.1 U1.3 U1.5 U1.6 U2.1 U3.1 | length 271
  Top Layer w0.8: F2.2 69.027,122.894 U2.1 68.078,124.974 68.834,125.73 77.343,125.73 77.597,125.984 ; U1.3 U1.6 80.743,143.354 U1.5 87.093,143.354 88.646,144.907 99.187,144.907 100.52,143.573 100.457,143.51 100.457,135.307 96.774,131.624 D2.1 91.313,128.576 91.313,116.586 v1(90.043,115.316)
  Top Layer w1: U3.1 53.34,127.762 52.578,128.524 52.578,134.747 56.134,138.303 59.817,138.303 ; C4.2 61.386,119.966 D4.1 67.806,119.966 F2.2 ; C2.2 77.597,128.437 77.597,125.984
  Top Layer w2: In.2 62.23,138.43 C1.2@64.627,136.033 ; C3.2@62.159,131.12 C3.2 62.611,134.018 C1.2@64.627,136.033 ; C2.2 77.343,130.897 U1.6@77.343,139.319 ; U1.6 U1.6@77.343,139.319 ; C1.2@64.627,136.033 C1.2 74.455,136.431 U1.6@77.343,139.319
  Bottom Layer w0.8: v1(90.043,115.316) 90.043,103.505 v1(90.932,102.616)
  Bottom Layer w2.5: In.2 57.912,137.668 78.74,116.84 78.867,116.967 83.439,116.967 86.233,114.173 86.233,102.743 98.552,90.424 113.03,90.424 124.761,102.155 MIST.2
  other v1: 89.789,109.855
AVCC: C4.1 D4.2 F1.2 U3.2 U3.4 | length 31.1
  Top Layer w1: U3.4 U3.2 55.64,121.52 C4.1 56.626,115.746 D4.2 68.441,115.746 F1.2
CO2: D5.1 SENS.3 | length 3.5
  Bottom Layer w1: SENS.3 54.834,108.331 D5.1
dht: SENS.4 U4.5 | length 11
  Top Layer w1: SENS.4 54.483,104.14 v1(61.849,104.14)
  Bottom Layer w1: U4.5 61.763,104.054 v1(61.849,104.14)
echo: U4.4 ULTRASONUIC.3 | length 29.5
  Bottom Layer w0.5: U4.4 59.723,102.774 62.167,100.33 72.644,100.33 75.057,102.743 78.359,102.743 78.994,103.378 78.994,110.871 ULTRASONUIC.3
FAN: R4.1 U4.13 | length 12.4
  Bottom Layer w1: U4.13 59.733,85.174 64.135,80.772 R4.1
FB: R6.2 U4.14 | length 15.3
  Bottom Layer w0.3: U4.14 57.753,85.503 65.278,77.978 R6.2
Fr: U4.10 ULTRASONUIC.1 | length 50.8
  Top Layer w0.2: v1(77.089,104.394) 77.089,102.108 v1(78.359,100.838)
  Bottom Layer w0.5: U4.10 65.773,86.5 67.056,85.217 73.279,85.217 77.724,80.772 80.391,80.772 80.772,81.153 80.772,98.425 v1(78.359,100.838) ; ULTRASONUIC.1 73.66,110.744 77.089,107.315 v1(77.089,104.394)
GND: 3V3.2 C5.1 C6.1 C7.1 F2.1 FLASH.2 pad.19@56.968,81.328 Q1.3 R5.2 RST.1 SENS.2 U4.9 ULTRASONUIC.2 | length 108.4
  Top Layer w1: SENS.2 66.802,110.871 v1(69.723,113.792) ; pad.19@56.968,81.328 56.968,87.702 61.023,91.757 FLASH.2 62.039,91.694 v1(65.913,91.694) ; v1(72.39,103.886) 72.39,103.505 v1(75.057,100.838)
  Bottom Layer w1: pad.19@56.968,81.328 56.968,77.652 3V3.2 ; C5.1 69.596,105.102 69.596,108.331 ; v1(72.39,103.886) 72.39,105.537 69.596,108.331 ; v1(75.057,100.838) 75.057,94.996 71.755,91.694 v1(65.913,91.694) 67.813,89.794 U4.9 74.346,86.87 Q1.3 ; ULTRASONUIC.2 76.2,114.3 72.009,118.491 v1(70.612,118.491) 70.612,118.11 69.669,117.167 C7.1 69.669,109.892 R5.2 69.596,108.331
k1: R10.2 U4.6 | length 29.6
  Top Layer w1: v1(63.773,103.778) 63.773,104.921 66.548,107.696 84.709,107.696 86.488,109.475 R10.2
  Bottom Layer w1: U4.6 v1(63.773,103.778) v1@63.881,103.886
k2: R11.2 U4.7 | length 23
  Top Layer w1: v1(65.786,103.886) 67.629,105.729 85.66,105.729 R11.2
  Bottom Layer w1: U4.7 65.763,103.863 v1(65.786,103.886)
KO1: D8.1 K1.4 KB1.4 Q2.3 | length 40.1
  Top Layer w1: Q2.3 92.744,115.604 98.044,120.904 98.044,129.667 99.822,131.445 KB1.4 111.42,131.445 K1.4
  Bottom Layer w2: K1.4@111.42,131.445 K1.4 112.492,131.826 D8.1
KO2: D9.1 K2.4 KB2.4 Q3.3 | length 23.9
  Top Layer w1: Q3.3 94.107,102.523 102.142,102.523 KB2.4 111.654,104.521 K2.4
  Bottom Layer w1: K2.4 113.157,103.112 D9.1
Netc8_1: c8.1 R7.2 | length 4.6
  Bottom Layer w1: c8.1 101.036,99.695 R7.2
Netc9_1: c9.1 R9.2 | length 13
  Top Layer w2: c9.1 100.965,118.745 v1(100.965,125.603)
NetD1-_2: D1-.2 U1.1 | length 11.8
  Bottom Layer w0.8: D1-.2 81.459,137.87 83.566,135.763 87.63,135.763 v1(87.63,135.89)
NetD1_2: D1-.1 D1.2 | length 4.3
  Bottom Layer w2: D1.2 D1-.1
NetD2_2: D2.2 L1.1 U1.2 | length 25
  Top Layer w0.8: U1.2 88.978,138.254 92.843,142.119 L1.1@94.361,142.119 ; D2.2 v1(94.361,126.746)
  Bottom Layer w0.8: v1(94.361,126.746) v1(94.361,141.351)
NetD3_2: D3.2 U2.3 | length 18.4
  Top Layer w1: U2.3 76.72,119.761 80.772,119.761 86.435,125.424 D3.2
NetD5_2: D5.2 D6.1 | length 5.2
  Bottom Layer w1: D5.2 55.88,112.933 D6.1
NetD6_2: D6.2 D7.1 | length 5.2
  Bottom Layer w1: D6.2 59.436,112.933 D7.1
NetFAN_2: FAN.2 R6.1 | length 48.3
  Top Layer w0.3: v1(71.755,77.978) 98.171,77.978 102.362,82.169 112.649,82.169 FAN.2
  Bottom Layer w0.3: R6.1 v1(71.755,77.978)
NetFAN_3: FAN.3 Q1.2 | length 26.4
  Bottom Layer w1: Q1.2 86.433,79.248 FAN.3
NetQ1_1: Q1.1 R4.2 | length 9.4
  Bottom Layer w1: 70.739,80.772 74.168,80.772 77.215,77.725 Q1.1
NetQ2_1: Q2.1 R10.1 | length 2.5
  Top Layer w1: R10.1 90.578,112.268 Q2.1
NetQ3_1: Q3.1 R11.1 | length 2.5
  Top Layer w1: R11.1 90.705,104.775 Q3.1
NetR1_1: R1.1 R2.2 U1.4 | length 27.5
  Top Layer w0.4: R1.1 77.597,122.936 R2.2@79.247,124.586 ; U1.4@86.36,141.478 v1(86.536,141.654) U1.4
  Bottom Layer w0.4: v1(79.756,125.095) 83.058,125.095 89.662,131.699 89.662,138.528 v1(86.536,141.654)
NetR3_1: R3.1 RST.2 U4.1 | length 41.3
  Top Layer w1: v1(53.213,103.505) 54.356,102.362 66.929,102.362 70.231,99.06 70.231,84.582 69.343,83.694 RST.2 64.77,82.551 R3.1
No1: c8.2 K1.3 MIST.1 | length 56.1
  Top Layer w1: v1(102.108,113.157) 108.204,113.157 v1(111.125,116.078)
  Bottom Layer w1: c8.2 102.108,110.109 v1(102.108,113.157) ; v1(111.125,116.078) 112.649,117.602 113.538,117.602
  Bottom Layer w3: K1.3 117.762,121.826 113.538,117.602 113.538,114.173 115.189,112.522 124.079,112.522 128.27,108.331 MIST.1
No2: c9.2 K2.3 MIST.3 | length 43.8
  Top Layer w1: c9.2 108.585,109.347 v1(110.617,107.315) ; v1(119.253,101.981) 124.079,97.155 MIST.3
  Bottom Layer w1: v1(110.617,107.315) 113.665,107.315 118.999,101.981 v1(119.253,101.981)
  Bottom Layer w3: K2.3 124.413,94.568 127,97.155 MIST.3
RX: 3V3.3 U4.15 | length 11.4
  Bottom Layer w0.3: 3V3.3 54.737,77.724 52.959,79.502 52.959,84.081 55.733,86.855 U4.15
Tr: FLASH.1 U4.12 ULTRASONUIC.4 | length 55.2
  Top Layer w1: FLASH.1 v1(61.976,85.725)
  Bottom Layer w0.5: v1(61.976,85.725) 63.754,83.947 73.152,83.947 77.47,79.629 80.645,79.629 81.661,80.645 81.661,110.744 ULTRASONUIC.4
TX: 3V3.4 U4.16 | length 10.2
  Bottom Layer w0.3: 3V3.4 52.197,85.314 U4.16
VCC: 3V3.1 C5.2 C6.2 F1.1 R3.2 U4.3 U4.8 | length 77.4
  Top Layer w1: 3V3.1 62.864,77.343 R3.2 69.978,79.249 72.136,81.407 72.136,100.584 68.834,103.886 v1(68.072,103.886)
  Bottom Layer w1: U4.3 57.753,104.235 59.309,105.791 65.405,105.791 67.014,107.4 C6.2 C5.2 v1@68.019,103.886 ; v1(68.072,103.886) 68.072,102.616 69.215,101.473 72.263,101.473 74.549,103.759 74.549,106.68 71.501,109.728 v1(71.501,115.697)
pads on no net: K1.2 K2.2 KB1.1 KB1.2 KB1.3 KB2.1 KB2.2 KB2.3 U4.11

## Polygon pours and split planes (outlines as drawn)
GND on Top Layer "B Layer-GNDDD" (solid, remove dead copper, pour order 4): 94.869,115.697 94.869,77.089 94.996,76.962 51.562,76.962 51.181,76.581 50.8,76.962 50.8,115.697
GND on Bottom Layer "B Layer-GNDDD" (solid, remove dead copper, pour order 6): 94.488,104.775 51.308,104.775 51.308,76.708 94.615,76.708 94.742,76.581

## Keep-outs
Keep-Out Layer:
  the board outline again, w0.1

## Silkscreen, mask and mechanical layers (free items; w line width, h text height)
Top Overlay:
  text "+38" at 60.452,144.907 h1
  text "GND" at 53.975,133.604 h1.52
  text "+5" at 55.626,112.649 h1 r90
  text "G" at 55.626,110.49 h1 r90
  text "CO2" at 55.626,106.934 h1 r90
  text "HT" at 55.626,104.521 h1 r90
  text "CM" at 110.109,81.534 h1.52
  text "FB" at 114.427,81.534 h1.52
  text "+12" at 118.237,81.534 h1.52

## Dimensions
50.8,76.2 to 130.8,76.2 on Mechanical 1
50.8,76.2 to 50.8,146.2 on Mechanical 1

## Text inside footprints (layer, text, board x,y; h text height)
In: Top Overlay "2" at 53.277,138.716 h1 r270; Top Overlay "1" at 53.277,143.542 h1 r270
K1: Top Overlay "NC" at 122.731,128.02 h1 r90; Top Overlay "NO" at 122.731,123.93 h1 r90
K2: Top Overlay "NC" at 122.631,100.762 h1 r90; Top Overlay "NO" at 122.631,96.672 h1 r90
MIST: Top Overlay "O1" at 125.857,106.807 h1 r90; Top Overlay "GND" at 124.841,104.648 h1 r270; Top Overlay "O2" at 125.984,98.171 h1 r90
U4: Mechanical 13 "ANTENNA AREA" at 45.909,102.743 h1 r90; Mechanical 13 "CUTOUT POLYGON" at 46.417,102.743 h1 r90